# EAGLE board OPL3 to print (EAGLE 5.11)
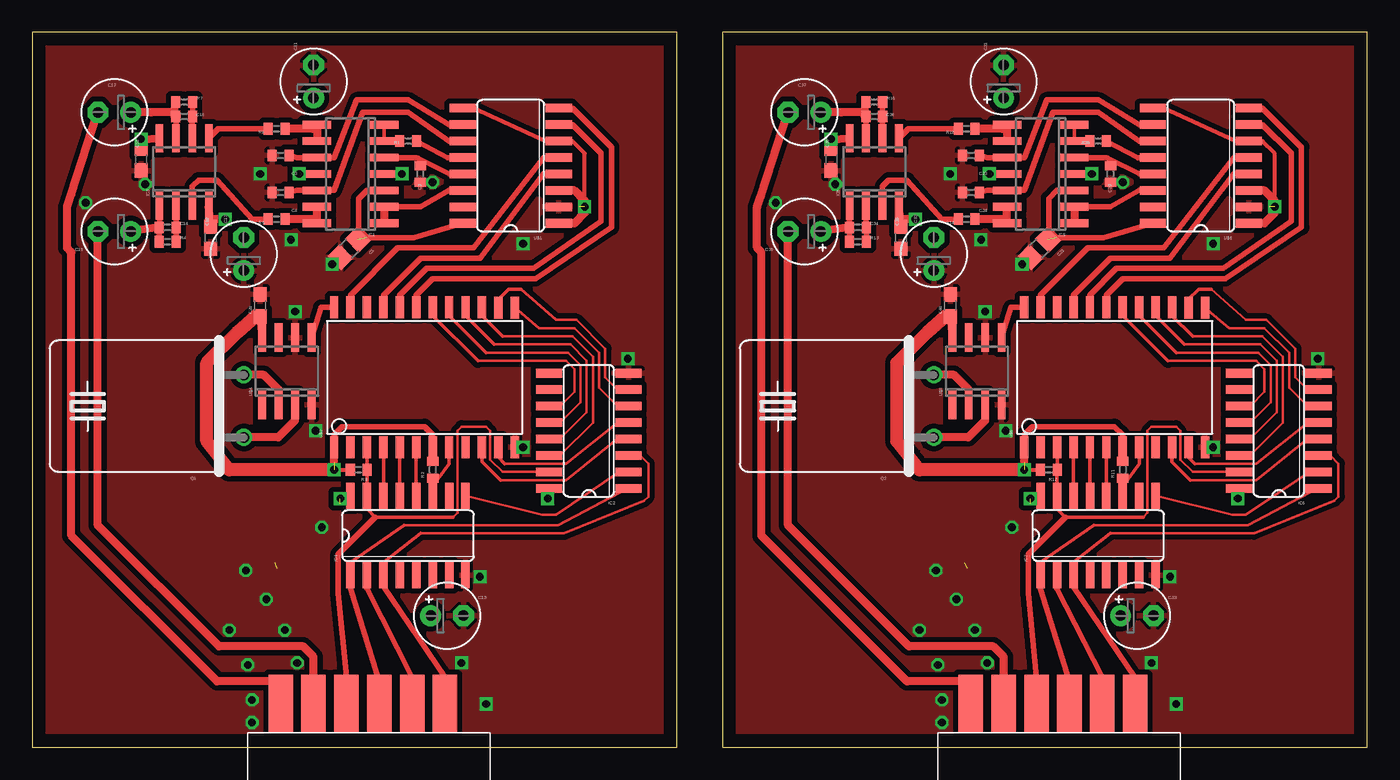
[diagram p0: board, top side]
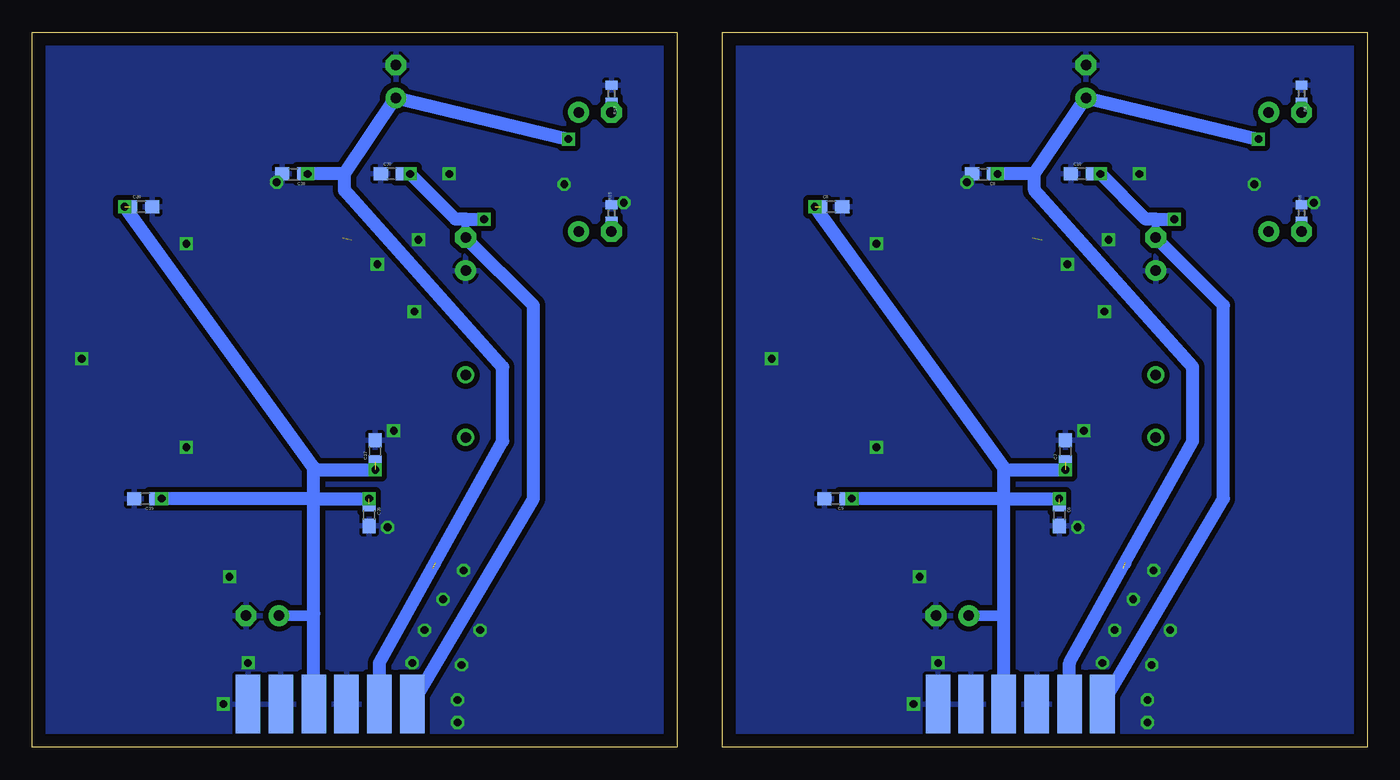
[diagram p1: board, bottom side, seen from below]

Size 103.18 x 55.23 mm. Coordinates in mm from the lower left corner, seen from the top.
Outline: 49.84,0 49.84,55.23 0,55.23 0,0 49.84,0
Outline: 103.18,0 103.18,55.23 53.34,55.23 53.34,0 103.18,0
Copper layers (1*16): Top 0.035mm / dielectric 1.5mm / Bottom 0.035mm
Design rules "default": minimum track width 10mil, minimum drill 24mil, track to track 8mil, track to pad 8mil, pad to pad 8mil, via to via 8mil, smd to smd 8mil, copper to edge 40mil, drill to drill 8mil, minimum pad ring 10mil, minimum via ring 8mil, stop-mask expansion 4mil, vias tented up to drill 0mil, thermal gap 10mil

## Footprints (pad centres in the part's own frame; a part is rotated, then mirrored left to right if it is on the bottom)
C0805 = smd 1.3 x 1.5: 1 -0.95,0; 2 0.95,0
C0402 = smd 0.7 x 0.9: 1 -0.65,0; 2 0.65,0
C0603 = smd 1.1 x 1: 1 -0.85,0; 2 0.85,0
E2,5-5 = drill 0.813 pad 1.6 round: + -1.27,0 | drill 0.813 pad 1.6 octagon: - 1.27,0
SO14 = smd 0.6 x 2.2: 1 -3.81,-2.6; 2 -2.54,-2.6; 3 -1.27,-2.6; 4 0,-2.6; 5 1.27,-2.6; 6 2.54,-2.6; 7 3.81,-2.6; 8 3.81,2.6; 9 2.54,2.6; 10 1.27,2.6; 11 0,2.6; 12 -1.27,2.6; 13 -2.54,2.6; 14 -3.81,2.6
SO16 = smd 0.66 x 2.032: 1 -4.445,-3.073; 2 -3.175,-3.073; 3 -1.905,-3.073; 4 -0.635,-3.073; 5 0.635,-3.073; 6 1.905,-3.073; 7 3.175,-3.073; 8 4.445,-3.073; 9 4.445,3.073; 10 3.175,3.073; 11 1.905,3.073; 12 0.635,3.073; 13 -0.635,3.073; 14 -1.905,3.073; 15 -3.175,3.073; 16 -4.445,3.073
SO08 = smd 0.6 x 2.2: 1 -1.905,-2.6; 2 -0.635,-2.6; 3 0.635,-2.6; 4 1.905,-2.6; 5 1.905,2.6; 6 0.635,2.6; 7 -0.635,2.6; 8 -1.905,2.6
HC49U-H = drill 0.813 round: 1 -2.413,-5.08; 2 2.413,-5.08
R0402 = smd 0.7 x 0.9: 1 -0.65,0; 2 0.65,0
16SOP = smd 0.66 x 2.032: 1 -4.445,-3.708; 2 -3.175,-3.708; 3 -1.905,-3.708; 4 -0.635,-3.708; 5 0.635,-3.708; 6 1.905,-3.708; 7 3.175,-3.708; 8 4.445,-3.708; 9 4.445,3.708; 10 3.175,3.708; 11 1.905,3.708; 12 0.635,3.708; 13 -0.635,3.708; 14 -1.905,3.708; 15 -3.175,3.708; 16 -4.445,3.708
24SOP = smd 0.65 x 1.7: 1 -8.89,-4.78; 2 -7.62,-4.78; 3 -6.35,-4.78; 4 -5.08,-4.78; 5 -3.81,-4.78; 6 -2.54,-4.78; 7 -1.27,-4.78; 8 0,-4.78; 9 1.27,-4.78; 10 2.54,-4.78; 11 3.81,-4.78; 12 5.08,-4.78; 13 5.08,6.015; 14 3.81,6.015; 15 2.54,6.05; 16 1.27,6.05; 17 0,6.05; 18 -1.27,6.05; 19 -2.54,6.05; 20 -3.81,6.05; 21 -5.08,6.05; 22 -6.35,6.05; 23 -7.62,6.05; 24 -8.89,6.05
SMD_PCB_EGGE_HDC12 = smd 4.5 x 1.9 bottom: 1 2.54,-7.62; 3 2.54,-5.08; 5 2.54,-2.54; 7 2.54,0; 9 2.54,2.54; 11 2.54,5.08 | smd 4.5 x 1.9: 2 2.54,-6.35; 4 2.54,-3.81; 6 2.54,-1.27; 8 2.54,1.27; 10 2.54,3.81; 12 2.54,6.35
SO-08 = smd 0.6 x 2.2: 1 -1.905,-2.6; 2 -0.635,-2.6; 3 0.635,-2.6; 4 1.905,-2.6; 5 1.905,2.6; 6 0.635,2.6; 7 -0.635,2.6; 8 -1.905,2.6

## Placement (x,y rotation side)
C1  10u  [C0805]  24.48,38.53 225 top
C2  68p  [C0402]  29.99,44.29 270 top
C3  2n7  [C0402]  19.2,45.72 180 top
C4  2n7  [C0402]  19.2,42.86 180 top
C5  0u1  [C0603]  41.11,19.21 180 bottom
C6  0u1  [C0603]  23.8,17.94 270 bottom
C7  0u1  [C0603]  23.33,22.86 90 bottom
C8  0u1  [C0603]  41.42,41.75 0 bottom
C9  0u1  [C0603]  29.68,44.29 180 bottom
C10  0u1  [C0603]  22.06,44.29 0 bottom
C11  10u  [E2,5-5]  21.74,51.44 90 top
C12  10u  [E2,5-5]  16.34,38.1 90 top
C13  10u  [E2,5-5]  32.06,10.16 0 top
C14  100p  [C0402]  10.47,40.16 180 top
C15  10u  [E2,5-5]  6.34,39.85 180 top
C16  100p  [C0402]  11.74,48.74 180 top
C17  10u  [E2,5-5]  6.34,49.05 180 top
C18  0u1  [C0603]  8.4,45.4 270 top
C19  0u1  [C0603]  13.8,39.37 90 top
C20  0u1  [C0603]  17.61,34.13 90 top
C21  10u  [C0805]  77.82,38.53 225 top
C22  68p  [C0402]  83.33,44.29 270 top
C23  2n7  [C0402]  72.54,45.72 180 top
C24  2n7  [C0402]  72.54,42.86 180 top
C25  0u1  [C0603]  94.45,19.21 180 bottom
C26  0u1  [C0603]  77.14,17.94 270 bottom
C27  0u1  [C0603]  76.67,22.86 90 bottom
C28  0u1  [C0603]  94.76,41.75 0 bottom
C29  0u1  [C0603]  83.02,44.29 180 bottom
C30  0u1  [C0603]  75.4,44.29 0 bottom
C31  10u  [E2,5-5]  75.08,51.44 90 top
C32  10u  [E2,5-5]  69.68,38.1 90 top
C33  10u  [E2,5-5]  85.4,10.16 0 top
C34  100p  [C0402]  63.81,40.16 180 top
C35  10u  [E2,5-5]  59.68,39.85 180 top
C36  100p  [C0402]  65.08,48.74 180 top
C37  10u  [E2,5-5]  59.68,49.05 180 top
C38  0u1  [C0603]  61.74,45.4 270 top
C39  0u1  [C0603]  67.14,39.37 90 top
C40  0u1  [C0603]  70.95,34.13 90 top
IC1  TL084D  [SO14]  24.6,44.29 90 top
IC2  4094D  [SO16]  43.01,24.45 90 top
IC3  LM833D  [SO08]  11.74,44.45 0 top
IC4  4094D  [SO16]  29.04,16.35 0 top
IC5  TL084D  [SO14]  77.94,44.29 90 top
IC6  4094D  [SO16]  96.35,24.45 90 top
IC7  4094D  [SO16]  82.38,16.35 0 top
IC8  LM833D  [SO08]  65.08,44.45 0 top
Q1  14.31818M  [HC49U-H]  11.26,26.35 90 top
Q2  14.31818M  [HC49U-H]  64.6,26.35 90 top
R1  33  [R0402]  29.04,46.83 180 top
R2  10k  [R0402]  30.95,21.43 90 top
R3  10k  [R0402]  25.23,21.43 180 top
R4  22k  [R0402]  10.47,39.05 180 top
R5  10k  [R0402]  18.88,40.8 180 top
R6  10k  [R0402]  5.07,41.28 270 bottom
R7  22k  [R0402]  11.74,49.85 180 top
R8  10k  [R0402]  5.07,50.48 270 bottom
R9  10k  [R0402]  18.88,47.78 180 top
R10  33  [R0402]  82.38,46.83 180 top
R11  10k  [R0402]  84.29,21.43 90 top
R12  10k  [R0402]  78.57,21.43 180 top
R13  22k  [R0402]  63.81,39.05 180 top
R14  10k  [R0402]  72.22,40.8 180 top
R15  10k  [R0402]  58.41,41.28 270 bottom
R16  22k  [R0402]  65.08,49.85 180 top
R17  10k  [R0402]  58.41,50.48 270 bottom
R18  10k  [R0402]  72.22,47.78 180 top
U$1  YAC512  [16SOP]  36.98,44.93 90 top
U$2  YMF262  [24SOP]  32.22,27.94 0 top
U$3  SMD_PCBEDGE_HDC12  [SMD_PCB_EGGE_HDC12]  25.55,0.79 90 top
U$4  NPC_OSC_IC  [SO-08]  19.68,29.05 0 top
U$5  YAC512  [16SOP]  90.32,44.93 90 top
U$6  YMF262  [24SOP]  85.56,27.94 0 top
U$7  SMD_PCBEDGE_HDC12  [SMD_PCB_EGGE_HDC12]  78.89,0.79 90 top
U$8  NPC_OSC_IC  [SO-08]  73.02,29.05 0 top

## Library data of the parts
C1-C40 R1-R18 = rcl
IC1 IC3 IC5 IC8 = linear
IC2 IC4 IC6 IC7 = 40xx
Q1 Q2 = crystal; OC_FARNELL: 1666973; OC_NEWARK: unknown
U$1 U$2 U$5 U$6 = OPL3
U$3 U$7 = edgeMounted_HDC
U$4 U$8 = OSC_IC

## Nets
+12V: C9.1 C11.+ C18.1 IC1.4 IC3.8 U$3.9
+12V1: C29.1 C31.+ C38.1 IC5.4 IC8.8 U$7.9
-12V: C10.2 C12.- C19.2 IC1.11 IC3.4 U$3.11
-12V1: C30.2 C32.- C39.2 IC5.11 IC8.4 U$7.11
A0: IC4.14 U$2.4
A1: IC4.13 U$2.5
A2: IC7.14 U$6.4
A3: IC7.13 U$6.5
CS#: IC4.11 R2.1 U$2.8
CS#1: IC7.11 R11.1 U$6.8
D0: IC2.4 U$2.10
D1: IC2.5 U$2.11
D2: IC2.6 U$2.13
D3: IC2.7 U$2.14
D4: IC2.14 U$2.15
D5: IC2.13 U$2.16
D6: IC2.12 U$2.17
D7: IC2.11 U$2.18
D8: IC6.4 U$6.10
D9: IC6.5 U$6.11
D10: IC6.6 U$6.13
D11: IC6.7 U$6.14
D12: IC6.14 U$6.15
D13: IC6.13 U$6.16
D14: IC6.12 U$6.17
D15: IC6.11 U$6.18
DAC_CLK: U$1.5 U$2.23
DAC_CLK1: U$5.5 U$6.23
DOAB: U$1.4 U$2.21
DOAB1: U$5.4 U$6.21
GND: C1.2 C2.2 C3.2 C4.2 C5.2 C6.2 C7.2 C8.2 C9.2 C10.1 C11.- C12.+ C13.- C18.2 C19.1 C20.2 IC2.8 IC4.8 R6.1 R8.1 U$1.2 U$2.12 U$3.1 U$3.3 U$3.7 U$4.4 U$4.6
GND1: C21.2 C22.2 C23.2 C24.2 C25.2 C26.2 C27.2 C28.2 C29.2 C30.1 C31.- C32.+ C33.- C38.2 C39.1 C40.2 IC6.8 IC7.8 R15.1 R17.1 U$5.2 U$6.12 U$7.1 U$7.3 U$7.7 U$8.4 U$8.6
LATCH: IC2.1 IC4.1 U$3.6
LATCH1: IC6.1 IC7.1 U$7.6
N$1: IC1.1 IC1.2 U$1.14
N$2: C1.1 IC1.3 U$1.16
N$3: R1.1 U$1.12
N$4: C2.1 IC1.5 U$1.13
N$5: IC1.6 IC1.7 R1.2
N$6: IC5.1 IC5.2 U$5.14
N$7: C21.1 IC5.3 U$5.16
N$8: IC2.2 IC4.9
N$9: R10.1 U$5.12
N$10: C17.- R8.2 U$3.12
N$11: IC1.8 IC1.9 R9.1
N$12: C4.1 IC1.12 U$1.11
N$13: C3.1 IC1.10 U$1.10
N$14: C22.1 IC5.5 U$5.13
N$15: IC5.6 IC5.7 R10.2
N$16: U$2.24 U$4.5
N$17: Q1.2 U$4.2
N$18: Q1.1 U$4.3
N$19: IC3.5 R9.2
N$20: IC1.13 IC1.14 R5.1
N$21: IC3.3 R5.2
N$22: C14.1 IC3.2 R4.1
N$23: C14.2 C15.+ IC3.1 R4.2
N$24: C37.- R17.2 U$7.12
N$25: C15.- R6.2 U$3.10
N$26: C24.1 IC5.12 U$5.11
N$27: C16.1 IC3.6 R7.1
N$28: C16.2 C17.+ IC3.7 R7.2
N$29: C23.1 IC5.10 U$5.10
N$30: U$6.24 U$8.5
N$31: IC6.2 IC7.9
N$32: Q2.2 U$8.2
N$33: Q2.1 U$8.3
N$34: C34.1 IC8.2 R13.1
N$35: C34.2 C35.+ IC8.1 R13.2
N$36: C35.- R15.2 U$7.10
N$37: C36.1 IC8.6 R16.1
N$38: C36.2 C37.+ IC8.7 R16.2
N$39: IC5.8 IC5.9 R18.1
N$40: IC5.13 IC5.14 R14.1
N$41: IC8.5 R18.2
N$42: IC8.3 R14.2
OE/RST#: IC2.15 IC4.15 R3.1 U$2.3 U$3.8
OE/RST#1: IC6.15 IC7.15 R12.1 U$6.3 U$7.8
SCK: IC2.3 IC4.3 U$3.2
SCK1: IC6.3 IC7.3 U$7.2
SDI: IC4.2 U$3.4
SDI1: IC7.2 U$7.4
SMPAC: U$1.7 U$2.20
SMPAC1: U$5.7 U$6.20
SMPBD: U$1.8 U$2.19
SMPBD1: U$5.8 U$6.19
VCC: C5.1 C6.1 C7.1 C8.1 C13.+ C20.1 IC2.16 IC4.16 R2.2 R3.2 U$1.1 U$1.3 U$1.6 U$1.9 U$2.1 U$2.7 U$3.5 U$4.8
VCC1: C25.1 C26.1 C27.1 C28.1 C33.+ C40.1 IC6.16 IC7.16 R11.2 R12.2 U$5.1 U$5.3 U$5.6 U$5.9 U$6.1 U$6.7 U$7.5 U$8.8
WR#: IC4.12 U$2.6
WR#1: IC7.12 U$6.6

## Tracks (layer width: path | path; a pad name or v marks a point on that pad's centre or on a via)
+12V  (via drill 0.6, 0.6 pad 0.25)  (1 unrouted)
  Top 0.406: v28.56,44.29 IC1.4
  Top 0.61: C18.1 v8.4,46.99 IC3.8
  Bottom 0.61: v28.56,44.29 C9.1 | 18.88,13.81 18.93,13.81
  Bottom 1.016: U$3.9 23.01,6.51 18.72,14.23 13.48,23.65 13.48,29.37 25.71,43.02 25.71,44.29 | v28.56,44.29 | 25.71,44.29 C11.+ | C11.+ | 25.71,44.29 v28.56,44.29 | v28.56,44.29 | C11.+ v8.4,46.99
+12V1  (via drill 0.6, 0.6 pad 0.25)  (1 unrouted)
  Top 0.406: v81.9,44.29 IC5.4
  Top 0.61: C38.1 v61.74,46.99 IC8.8
  Bottom 0.61: v81.9,44.29 C29.1 | 72.27,13.81 72.22,13.81
  Bottom 1.016: U$7.9 76.35,6.51 72.06,14.23 66.82,23.65 66.82,29.37 79.05,43.02 79.05,44.29 | v81.9,44.29 | 79.05,44.29 C31.+ | C31.+ | 79.05,44.29 v81.9,44.29 | v81.9,44.29 | C31.+ v61.74,46.99
-12V  (via drill 0.6)
  Top 0.61: v20.63,44.29 IC1.11 | 13.75,40.75 C19.2 | 13.75,40.75 IC3.4 | v14.91,40.8 13.8,40.8 13.75,40.75
  Bottom 0.61: v20.63,44.29 C10.2 | C12.- 16.34,40.8 | 16.34,40.8
  Bottom 1.016: U$3.11 11.1,19.21 11.1,34.13 C12.- | v20.63,44.29 | v20.63,44.29 17.14,40.8 16.34,40.8 v14.91,40.8 | v14.91,40.8
-12V1  (via drill 0.6)
  Top 0.61: v73.97,44.29 IC5.11 | 67.09,40.75 C39.2 | 67.09,40.75 IC8.4 | v68.25,40.8 67.14,40.8 67.09,40.75
  Bottom 0.61: v73.97,44.29 C30.2 | C32.- 69.68,40.8 | 69.68,40.8
  Bottom 1.016: U$7.11 64.44,19.21 64.44,34.13 C32.- | v73.97,44.29 | v73.97,44.29 70.48,40.8 69.68,40.8 v68.25,40.8 | v68.25,40.8
A0
  Top 0.254: IC4.14 U$2.4 | U$2.4
A1
  Top 0.254: IC4.13 U$2.5 | U$2.5
A2
  Top 0.254: IC7.14 U$6.4
A3
  Top 0.254: IC7.13 U$6.5
CS#
  Top 0.254: U$2.8 32.22,21.91 30.95,20.16 | 30.95,20.16 R2.1 | IC4.11 30.95,20.16
CS#1
  Top 0.254: U$6.8 85.56,21.91 84.29,20.16 | 84.29,20.16 R11.1 | IC7.11 84.29,20.16 | 84.29,20.16
D0
  Top 0.2: IC2.4 45.23,23.81 41.26,20.64 36.18,20.64
  Top 0.254: 36.18,20.64 34.76,22.07 U$2.10
D1
  Top 0.2: IC2.5 45.23,25.08 41.26,21.91 36.5,21.91
  Top 0.254: 36.5,21.91 36.03,22.38 U$2.11
D2
  Top 0.2: IC2.6 45.23,26.35 43.8,27.78 43.8,30.48 41.9,32.38 39.18,32.38 U$2.13
D3
  Top 0.2: IC2.7 45.23,27.62 44.28,28.57 44.28,30.8 42.06,33.02 40.47,33.02 37.77,35.4
  Top 0.254: 37.77,35.4 36.82,35.4 36.03,34.61 U$2.14
D4
  Top 0.2: IC2.14 40.79,22.54 43.33,25.08 43.33,30.16 41.74,31.75 36.34,31.75
  Top 0.254: 36.34,31.75 34.76,33.34 U$2.15
D5
  Top 0.2: IC2.13 40.79,23.81 42.85,25.88 42.85,29.84 41.58,31.11 35.71,31.11
  Top 0.254: 35.71,31.11 33.49,33.34 U$2.16
D6
  Top 0.2: IC2.12 40.79,25.08 42.38,26.67 42.38,29.53 41.42,30.48 35.07,30.48
  Top 0.254: 35.07,30.48 32.22,33.34 U$2.17
D7
  Top 0.2: IC2.11 40.79,26.35 41.9,27.46 41.9,29.21 41.26,29.84 34.44,29.84
  Top 0.254: 34.44,29.84 30.95,33.34 U$2.18
D8
  Top 0.2: IC6.4 98.57,23.81 94.6,20.64 89.52,20.64
  Top 0.254: 89.52,20.64 88.1,22.07 U$6.10
D9
  Top 0.2: IC6.5 98.57,25.08 94.6,21.91 89.84,21.91
  Top 0.254: 89.84,21.91 89.37,22.38 U$6.11
D10
  Top 0.2: IC6.6 98.57,26.35 97.14,27.78 97.14,30.48 95.24,32.38 92.52,32.38 U$6.13
D11
  Top 0.2: IC6.7 98.57,27.62 97.62,28.57 97.62,30.8 95.4,33.02 93.81,33.02 91.11,35.4
  Top 0.254: 91.11,35.4 90.16,35.4 89.37,34.61 U$6.14
D12
  Top 0.2: IC6.14 94.13,22.54 96.67,25.08 96.67,30.16 95.08,31.75 89.68,31.75
  Top 0.254: 89.68,31.75 88.1,33.34 U$6.15
D13
  Top 0.2: IC6.13 94.13,23.81 96.19,25.88 96.19,29.84 94.92,31.11 89.05,31.11
  Top 0.254: 89.05,31.11 86.83,33.34 U$6.16
D14
  Top 0.2: IC6.12 94.13,25.08 95.72,26.67 95.72,29.53 94.76,30.48 88.41,30.48
  Top 0.254: 88.41,30.48 85.56,33.34 U$6.17
D15
  Top 0.2: IC6.11 94.13,26.35 95.24,27.46 95.24,29.21 94.6,29.84 87.78,29.84
  Top 0.254: 87.78,29.84 84.29,33.34 U$6.18
DAC_CLK
  Top 0.406: U$2.23 24.6,34.92 28.25,38.58 33.49,38.58 34.12,38.58 39.52,45.56 U$1.5
DAC_CLK1
  Top 0.406: U$6.23 77.94,34.92 81.59,38.58 86.83,38.58 87.46,38.58 92.86,45.56 U$5.5
DOAB
  Top 0.406: U$2.21 27.14,34.92 29.99,37.78 34.6,37.78 39.52,44.29 U$1.4
DOAB1
  Top 0.406: U$6.21 80.48,34.92 83.33,37.78 87.94,37.78 92.86,44.29 U$5.4
GND  (via drill 0.6)
  other vias: 37.93,38.89 30.95,43.66 34.6,13.18 33.17,6.51 37.93,23.18 35.07,3.33 46.03,30 17.61,44.29 21.9,24.45 20.47,6.51 16.98,3.65 16.98,1.91 16.66,6.35 15.23,9.05 19.52,9.05 18.09,11.43 16.5,13.65 22.37,16.99 8.72,43.5 20.31,33.66 19.99,39.21 23.17,37.31 4.12,42.07
  pour Bottom (isolate 0.406): 49.84,0 49.84,55.56 -0.01,55.56 -0.01,0
  pour Top (isolate 0.406): 49.84,0 49.84,55.56 -0.01,55.56 -0.01,0
GND1  (via drill 0.6)
  other vias: 91.27,38.89 84.29,43.66 87.94,13.18 86.51,6.51 91.27,23.18 88.41,3.33 99.37,30 70.95,44.29 75.24,24.45 73.81,6.51 70.32,3.65 70.32,1.91 70,6.35 68.57,9.05 72.86,9.05 71.43,11.43 69.84,13.65 75.71,16.99 62.06,43.5 73.65,33.66 73.33,39.21 76.51,37.31 57.46,42.07
  pour Bottom (isolate 0.406): 103.18,0 103.18,55.56 53.33,55.56 53.33,0
  pour Top (isolate 0.406): 103.18,0 103.18,55.56 53.33,55.56 53.33,0
LATCH
  Top 0.2: IC2.1 46.03,20 40.63,17.14 28.72,17.14
  Top 0.254: 28.72,17.14 24.6,14.29 IC4.1 | IC4.1
  Top 0.406: U$3.6 26.82,5.08 24.6,12.22 IC4.1 | IC4.1
LATCH1
  Top 0.2: IC6.1 99.37,20 93.97,17.14 82.06,17.14
  Top 0.254: 82.06,17.14 77.94,14.29 IC7.1 | IC7.1
  Top 0.406: U$7.6 80.16,5.08 77.94,12.22 IC7.1 | IC7.1
N$1
  Top 0.406: U$1.14 32.22,43.02 29.99,41.75 IC1.2
  Top 0.61: IC1.2 IC1.1
N$2  (1 unrouted)
  Top 0.406: U$1.16 29.46,39.37 25.87,39.37 25.23,40.01 25.23,42.39 25.87,43.02 IC1.3
N$3
  Top 0.406: U$1.12 32.11,45.56 R1.1
N$4
  Top 0.254: C2.1 29.99,45.31 29.8,45.5
  Top 0.406: U$1.13 32.22,44.29 29.8,45.5 29.68,45.56 IC1.5
N$5
  Top 0.254: R1.2 IC1.6 IC1.7
N$6
  Top 0.406: U$5.14 85.56,43.02 83.33,41.75 IC5.2
  Top 0.61: IC5.2 IC5.1
N$7  (1 unrouted)
  Top 0.406: U$5.16 82.8,39.37 79.21,39.37 78.57,40.01 78.57,42.39 79.21,43.02 IC5.3
N$8
  Top 0.2: IC2.2 45.39,21.27 40.47,17.94 39.42,17.94 IC4.9
N$9
  Top 0.406: U$5.12 85.45,45.56 R10.1
N$10
  Top 0.61: 19.2,5.08 14.28,5.08 3.01,16.35 3.01,38.26 2.69,38.58 2.69,41.75 3.01,42.7 | C17.- | 3.01,42.7 C17.- | 3.01,42.7
  Top 0.813: U$3.12 19.2,5.08
  Bottom 0.61: C17.- R8.2 | C17.-
N$11
  Top 0.61: IC1.9 IC1.8 21.68,47.78 R9.1
N$12
  Top 0.406: U$1.11 32.22,46.83 29.04,49.05 25.55,49.05 23.33,43.02 IC1.12 20.47,43.02 C4.1
N$13
  Top 0.406: U$1.10 32.22,48.1 29.04,50.01 25.07,50.01 23.33,45.56 IC1.10 20.47,45.56 C3.1
N$14
  Top 0.254: C22.1 83.33,45.31 83.14,45.5
  Top 0.406: U$5.13 85.56,44.29 83.14,45.5 83.02,45.56 IC5.5
N$15
  Top 0.254: R10.2 IC5.6 IC5.7
N$16
  Top 0.406: U$2.24 23.33,33.97 22.31,33.97 U$4.5
N$17
  Top 0.61: Q1.2 17.9,28.77 19.04,27.62 U$4.2
N$18
  Top 0.61: Q1.1 19.01,23.94 20.31,25.24 U$4.3
N$19
  Top 0.406: R9.2 14.38,47.78 IC3.5
N$20
  Top 0.61: IC1.13 IC1.14 21.68,40.8 R5.1
N$21
  Top 0.406: R5.2 16.98,40.8 14.28,43.81 12.85,43.81 12.37,43.34 IC3.3 | IC3.3
N$22
  Top 0.406: IC3.2 11.1,40.06 C14.1 R4.1
N$23
  Top 0.406: R4.2 C14.2 9.83,40.06 IC3.1 9.77,41.91
  Top 0.61: C14.2 C15.+
N$24
  Top 0.61: 72.54,5.08 67.62,5.08 56.35,16.35 56.35,38.26 56.03,38.58 56.03,41.75 56.35,42.7 | C37.- | 56.35,42.7 C37.- | 56.35,42.7
  Top 0.813: U$7.12 72.54,5.08
  Bottom 0.61: C37.- R17.2 | C37.-
N$25
  Top 0.61: U$3.10 21.74,6.99 20.94,7.78 14.44,7.78 5.07,17.14 C15.-
  Bottom 0.61: C15.- R6.2 | C15.-
N$26
  Top 0.406: U$5.11 85.56,46.83 82.38,49.05 78.89,49.05 76.67,43.02 IC5.12 73.81,43.02 C24.1
N$27
  Top 0.406: R7.1 C16.1 12.37,48.84 IC3.6
N$28
  Top 0.406: R7.2 C16.2 11.1,48.84 IC3.7
  Top 0.61: 8.09,49.05 9.2,49.05 10.89,49.05
  Top 0.813: 8.09,49.05 C17.+ | C16.2 10.89,49.05
N$29
  Top 0.406: U$5.10 85.56,48.1 82.38,50.01 78.41,50.01 76.67,45.56 IC5.10 73.81,45.56 C23.1
N$30
  Top 0.406: U$6.24 76.67,33.97 75.65,33.97 U$8.5
N$31
  Top 0.2: IC6.2 98.73,21.27 93.81,17.94 92.76,17.94 IC7.9
N$32
  Top 0.61: Q2.2 71.24,28.77 72.38,27.62 U$8.2
N$33
  Top 0.61: Q2.1 72.35,23.94 73.65,25.24 U$8.3
N$34
  Top 0.406: IC8.2 64.44,40.06 C34.1 R13.1
N$35
  Top 0.406: R13.2 C34.2 63.17,40.06 IC8.1 63.11,41.91
  Top 0.61: C34.2 C35.+
N$36
  Top 0.61: U$7.10 75.08,6.99 74.28,7.78 67.78,7.78 58.41,17.14 C35.-
  Bottom 0.61: C35.- R15.2 | C35.-
N$37
  Top 0.406: R16.1 C36.1 65.71,48.84 IC8.6
N$38
  Top 0.406: R16.2 C36.2 64.44,48.84 IC8.7
  Top 0.61: 61.43,49.05 62.54,49.05 64.23,49.05
  Top 0.813: 61.43,49.05 C37.+ | C36.2 64.23,49.05
N$39
  Top 0.61: IC5.9 IC5.8 75.02,47.78 R18.1
N$40
  Top 0.61: IC5.13 IC5.14 75.02,40.8 R14.1
N$41
  Top 0.406: R18.2 67.72,47.78 IC8.5
N$42
  Top 0.406: R14.2 70.32,40.8 67.62,43.81 66.19,43.81 65.71,43.34 IC8.3 | IC8.3
OE/RST#
  Top 0.2: IC2.15 36.34,21.27 35.39,22.23 35.39,24.45 35.07,24.77 33.17,24.77 32.85,24.45 32.85,18.1 32.53,17.78
  Top 0.254: IC4.15 25.87,21.42 R3.1 25.88,23.14 U$2.3 | 32.53,17.78 26.5,17.78 25.87,18.41 IC4.15 | IC4.15
  Top 0.406: R3.1 25.87,21.13 | 26.5,17.78 23.64,14.92 23.64,11.91 24.28,5.4 U$3.8
OE/RST#1
  Top 0.2: IC6.15 89.68,21.27 88.73,22.23 88.73,24.45 88.41,24.77 86.51,24.77 86.19,24.45 86.19,18.1 85.87,17.78
  Top 0.254: IC7.15 79.21,21.42 R12.1 79.22,23.14 U$6.3 | 85.87,17.78 79.84,17.78 79.21,18.41 IC7.15 | IC7.15
  Top 0.406: R12.1 79.21,21.13 | 79.84,17.78 76.98,14.92 76.98,11.91 77.62,5.4 U$7.8
SCK
  Top 0.2: IC2.3 46.98,22.54 47.61,21.91 47.61,19.37 47.3,19.05 41.11,16.51 29.99,16.51
  Top 0.254: 29.99,16.51 27.14,14.29 IC4.3 | IC4.3
  Top 0.406: U$3.2 31.9,5.4 27.14,12.38 IC4.3 | IC4.3
SCK1
  Top 0.2: IC6.3 100.32,22.54 100.95,21.91 100.95,19.37 100.64,19.05 94.45,16.51 83.33,16.51
  Top 0.254: 83.33,16.51 80.48,14.29 IC7.3
  Top 0.406: U$7.2 85.24,5.4 80.48,12.38 IC7.3
SDI
  Top 0.406: U$3.4 29.36,5.4 25.87,12.22 IC4.2 | IC4.2
SDI1
  Top 0.406: U$7.4 82.7,5.4 79.21,12.22 IC7.2 | IC7.2
SMPAC
  Top 0.406: U$2.20 28.41,34.92 30.47,36.99 38.72,36.99 43.96,40.64 43.96,45.88 41.74,48.1 U$1.7
SMPAC1
  Top 0.406: U$6.20 81.75,34.92 83.81,36.99 92.06,36.99 97.3,40.64 97.3,45.88 95.08,48.1 U$5.7
SMPBD
  Top 0.406: U$2.19 29.68,34.92 30.95,36.2 38.88,36.2 44.76,40.16 44.76,46.35 41.74,49.37 U$1.8
SMPBD1
  Top 0.406: U$6.19 83.02,34.92 84.29,36.2 92.22,36.2 98.1,40.16 98.1,46.35 95.08,49.37 U$5.8
VCC  (via drill 0.6)  (3 unrouted)
  Top 0.2: IC2.16 39.94,19.31 v39.84,19.21
  Top 0.305: R3.2 23.48,21.43 v23.33,21.43 | U$2.7 R2.2 | v42.69,41.75 42.69,42.07 | 42.69,42.23 42.69,45.88 41.74,46.83 U$1.6 39.68,46.83 34.12,49.37 U$1.9
  Top 0.406: U$2.7 30.95,24.13 30.31,24.77 23.96,24.77 23.33,24.13 U$2.1
  Top 0.61: U$1.1 41.9,40.48 42.69,41.27 v42.69,41.75 | v42.69,41.75 42.69,42.07 42.69,42.23 41.9,43.02 U$1.3 | v23.33,21.43 U$2.1 | v42.69,41.75 | IC4.16 24.02,19.43 v23.8,19.21 | C20.1 U$4.8
  Top 0.813: v23.33,21.43
  Top 1.016: v23.33,21.43 15.23,21.43 13.48,23.65 13.48,29.69 15.86,32.07 17.29,33.34 17.55,33.34 C20.1
  Bottom 0.2: v39.84,19.21 C5.1
  Bottom 0.813: C13.+ 28.25,10.16 28.09,10.32
  Bottom 1.016: U$3.5 28.09,10.32 28.09,19.21 | 28.09,19.21 28.09,21.43 | 28.09,19.21 v39.84,19.21 | 28.09,19.21 v23.8,19.21 | 28.09,21.43 v23.33,21.43 | 28.09,21.43 28.09,21.59 v42.69,41.75
VCC1  (via drill 0.6)  (3 unrouted)
  Top 0.2: IC6.16 93.28,19.31 v93.18,19.21
  Top 0.305: R12.2 76.82,21.43 v76.67,21.43 | U$6.7 R11.2 | v96.03,41.75 96.03,42.07 | 96.03,42.23 96.03,45.88 95.08,46.83 U$5.6 93.02,46.83 87.46,49.37 U$5.9
  Top 0.406: U$6.7 84.29,24.13 83.65,24.77 77.3,24.77 76.67,24.13 U$6.1
  Top 0.61: U$5.1 95.24,40.48 96.03,41.27 v96.03,41.75 | v96.03,41.75 96.03,42.07 96.03,42.23 95.24,43.02 U$5.3 | v76.67,21.43 U$6.1 | v96.03,41.75 | IC7.16 77.36,19.43 v77.14,19.21 | C40.1 U$8.8
  Top 0.813: v76.67,21.43
  Top 1.016: v76.67,21.43 68.57,21.43 66.82,23.65 66.82,29.69 69.2,32.07 70.63,33.34 70.89,33.34 C40.1
  Bottom 0.2: v93.18,19.21 C25.1
  Bottom 0.813: C33.+ 81.59,10.16 81.43,10.32
  Bottom 1.016: U$7.5 81.43,10.32 81.43,19.21 | 81.43,19.21 81.43,21.43 | 81.43,19.21 v93.18,19.21 | 81.43,19.21 v77.14,19.21 | 81.43,21.43 v76.67,21.43 | 81.43,21.43 81.43,21.59 v96.03,41.75
WR#
  Top 0.254: IC4.12 U$2.6
WR#1
  Top 0.254: IC7.12 U$6.6 | U$6.6